# Altium PCB Heater PCB Column Coil.PcbDoc
Units mm, origin at the board's own origin, x right, y up, seen from the top; angles counter-clockwise.
Board outline 101.87 x 102 mm, 2 copper layers (Top Layer, Bottom Layer), stack 1.57 mm thick; 2 components, 1 nets, 2 pads, 0 vias.
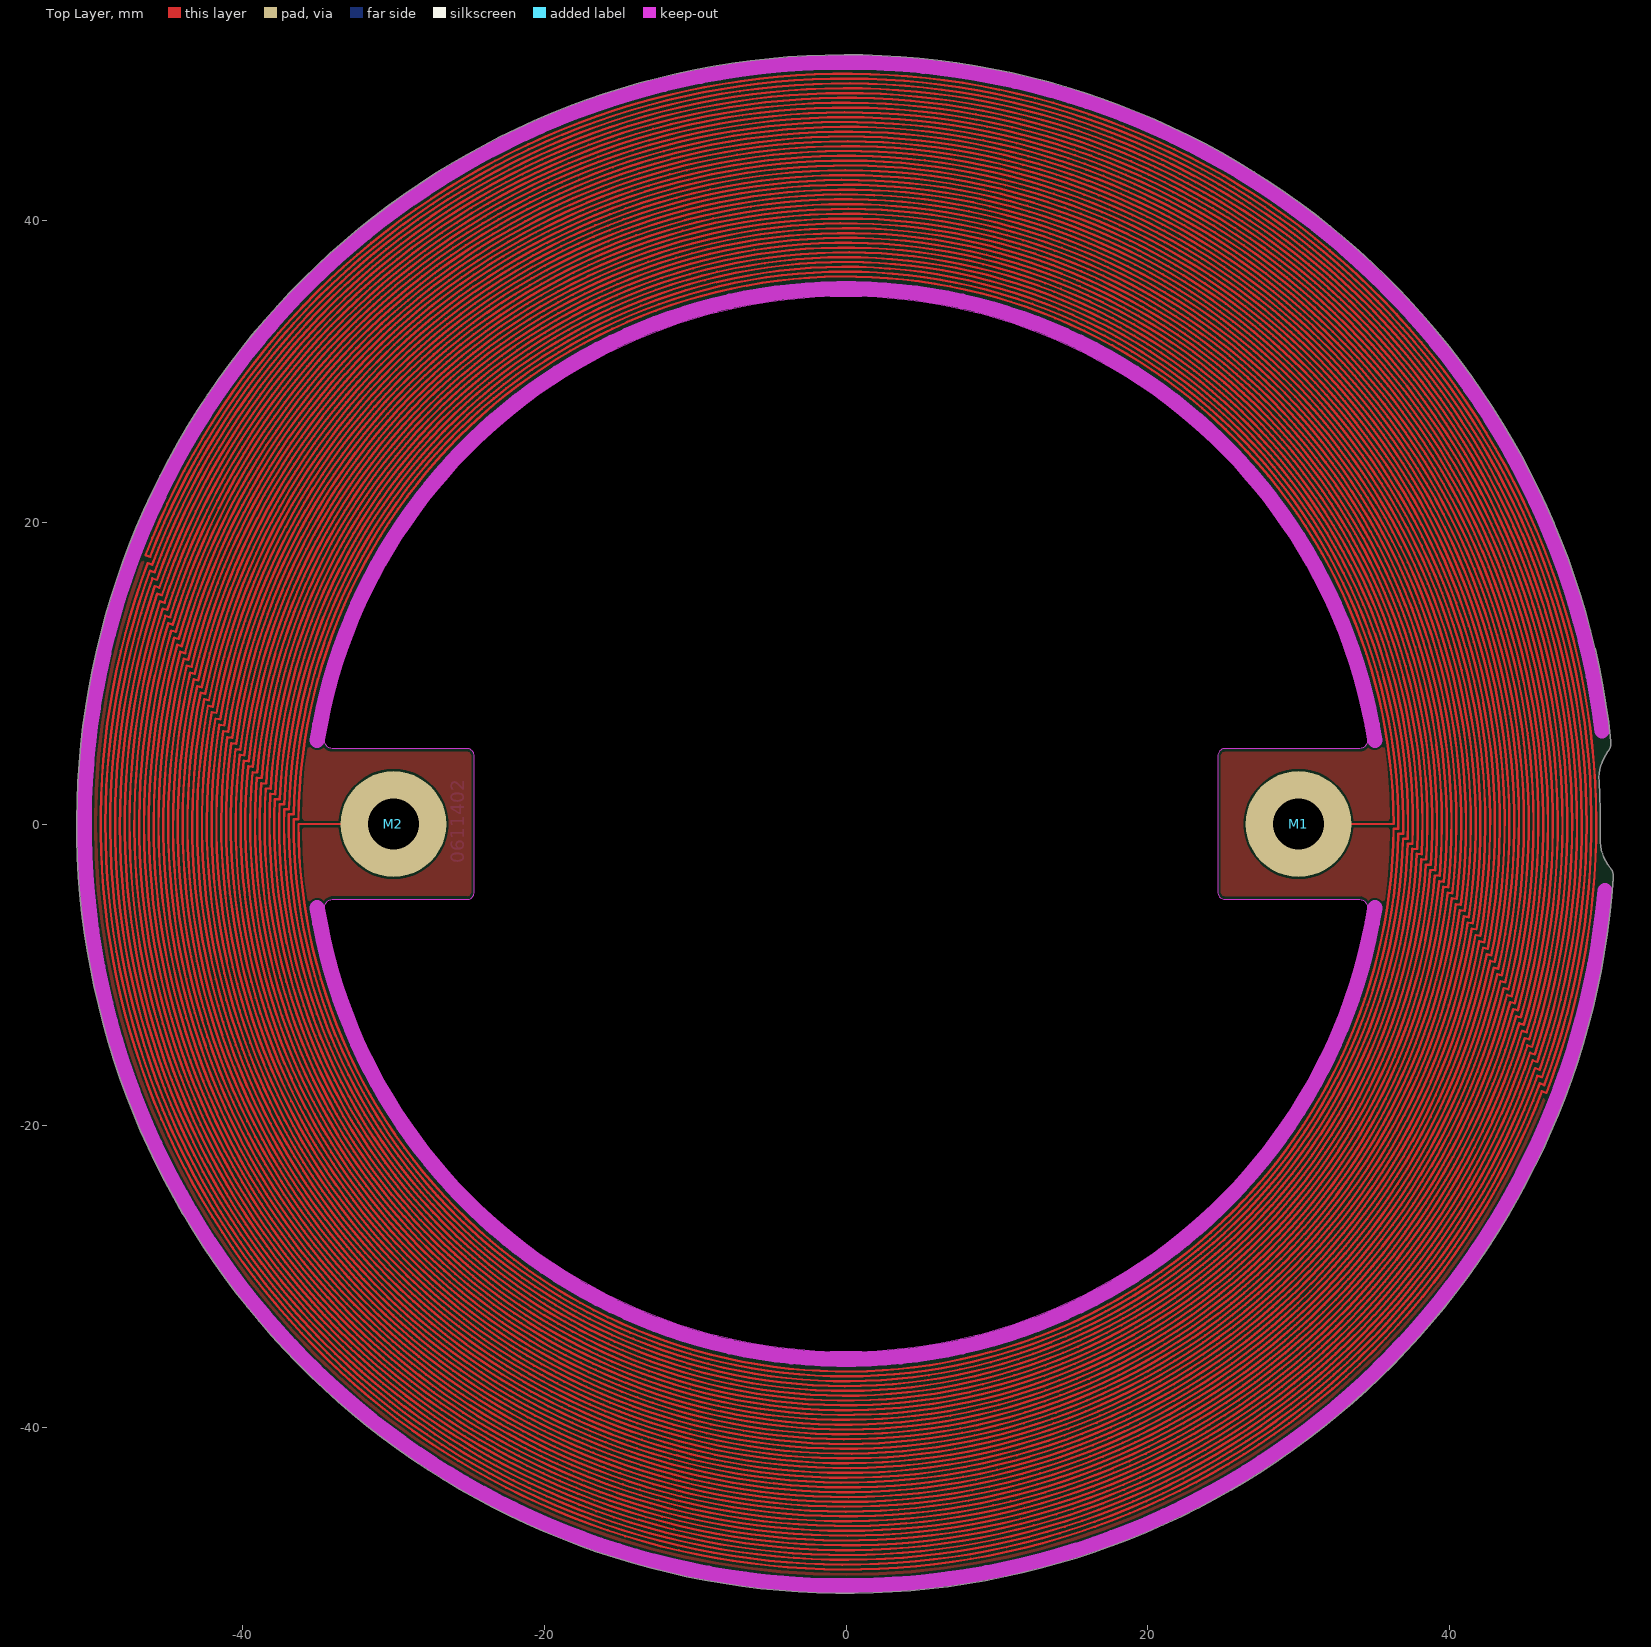
[diagram p0: Top Layer view]
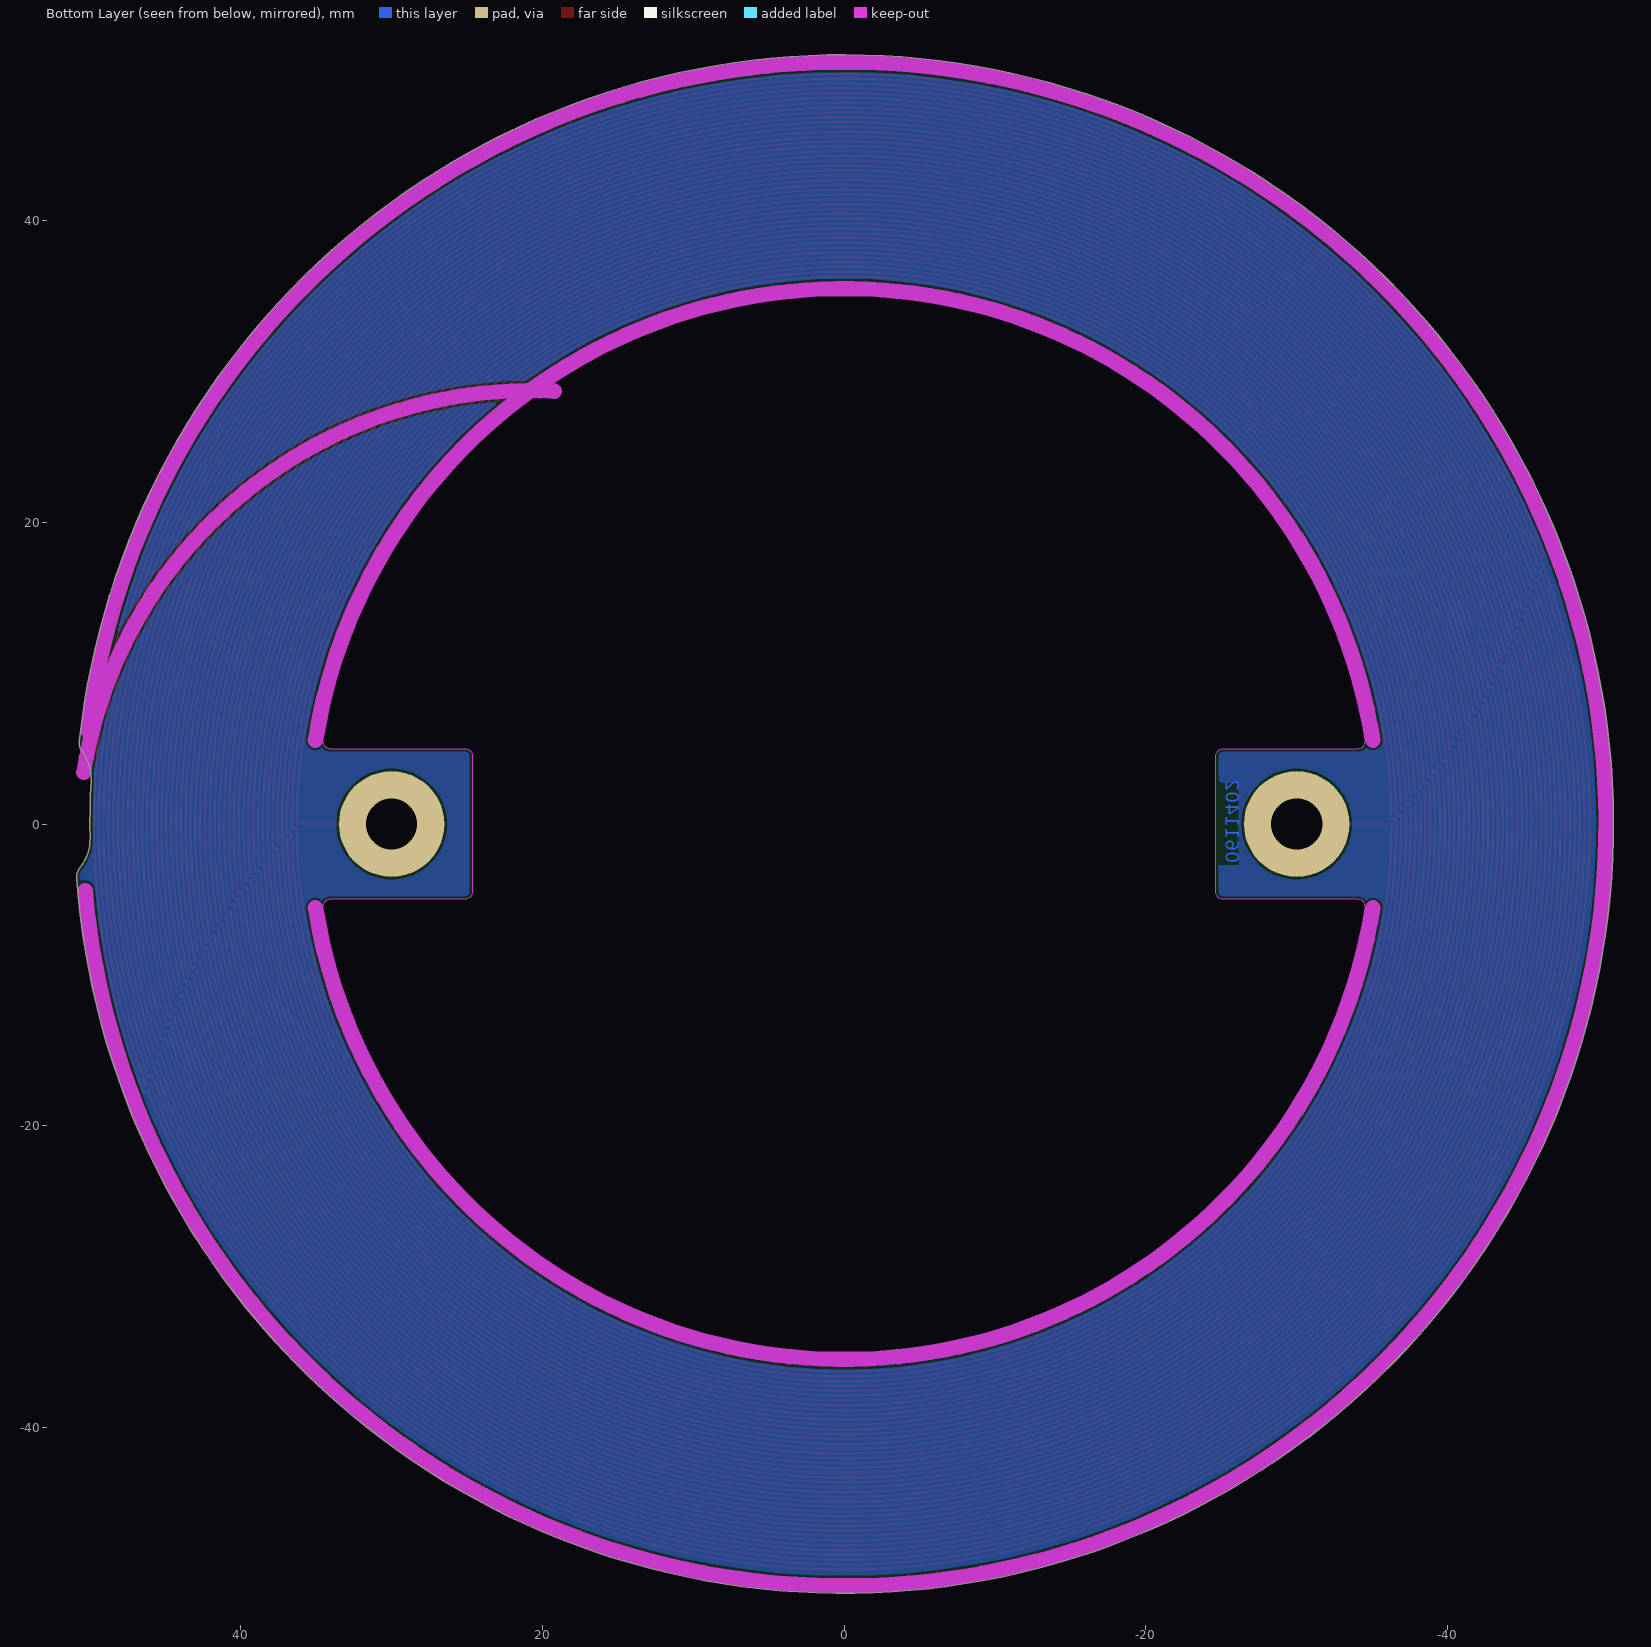
[diagram p1: Bottom Layer view, seen from below]

## Layer stack, top to bottom
Top Solder: solder mask 0.0102, Solder Resist, Dk 3.5
Top Layer: signal copper 0.0356
Dielectric 1: core 1.4986, Core-043, Dk 4.3
Bottom Layer: signal copper 0.0356
Bottom Solder: solder mask 0.0102, Solder Resist, Dk 3.5

## Board outline
50.874,-3.581 cw(c0,0) 50.703,5.499 cw(c49.709,5.391) 50.51,4.793 ccw(c52.915,3) 49.92,2.83 cw(c0.001,0) 49.991,-0.943 ccw(c52.991,-1) 50.655,-2.883 cw(c49.877,-3.511)
cut-out: -34.059,-5 -25.141,-5 ccw(c-25.141,-4.5) -24.641,-4.5 -24.641,4.5 ccw(c-25.141,4.5) -25.141,5 -34.059,5 cw(c-34.059,5.5) -34.552,5.58 cw(c0,0) 34.552,5.58 cw(c34.059,5.5) 34.059,5 25.141,5 ccw(c25.141,4.5) 24.641,4.5 24.641,-4.5 ccw(c25.141,-4.5) 25.141,-5 34.059,-5 cw(c34.059,-5.5) 34.552,-5.58 cw(c0,0) -34.552,-5.58 cw(c-34.059,-5.5)

## Design rules (kind name [scope] priority, off if disabled: settings)
BoardOutlineClearance [All] p1: gap=0.2 ignorepadtopadclearanceinfootprint=FALSE
Clearance [All] p1: gap=0.152 ignorepadtopadclearanceinfootprint=TRUE
ComponentClearance [All] p1: gap=0.127 collisioncheckmode=3 verticalgap=0.127 showdistances=TRUE
DiffPairsRouting [All] p1: maxlimit=0.254 minlimit=0.127 mostfreqgap=0.127 toplayer_minwidth=0.127 toplayer_maxwidth=25.4 toplayer_prefwidth=0.127 bottomlayer_minwidth=0.127 bottomlayer_maxwidth=25.4 bottomlayer_prefwidth=0.127 maxuncoupledlength=12.7
Height [All] p1: minheight=0 maxheight=1816.048 prefheight=12.7
HoleSize [All] p1: absolutevalues=TRUE maxlimit=6.3 minlimit=0.3 maxpercent=80.000 minpercent=20.000
HoleToHoleClearance [All] p1: gap=0.254 allowstackedmicrovias=FALSE
MinimumAnnularRing [All] p1: minimumring=0.152
MinimumSolderMaskSliver [All] p1: minsoldermaskwidth=0.152
PlaneClearance [All] p1: clearance=0.127
PlaneConnect PlaneConnectPowerPads [InPadClass('PowerPads')] p1: planeconnectstyle=Direct reliefexpansion=0.508 reliefentries=4 reliefconductorwidth=0.254 reliefairgap=0.254
PlaneConnect [All] p2: pad.planeconnectstyle=Relief pad.reliefexpansion=0.3 pad.reliefentries=4 pad.reliefconductorwidth=0.127 pad.reliefairgap=0.127 via.planeconnectstyle=Direct via.reliefexpansion=0.3 via.reliefentries=4 via.reliefconductorwidth=0.127 via.reliefairgap=0.127
PolygonConnect PolygonConnectPowerPads [All vs (InPadClass('PowerPads'))] p1: connectstyle=Direct reliefconductorwidth=0.254 reliefentries=4 polygonreliefangle="90 Angle" airgapwidth=0.254
PolygonConnect [All] p2: thpad.connectstyle=Relief thpad.reliefconductorwidth=0.127 thpad.reliefentries=4 thpad.polygonreliefangle="90 Angle" thpad.airgapwidth=0.127 smdpad.connectstyle=Relief smdpad.reliefconductorwidth=0.127 smdpad.reliefentries=4 smdpad.polygonreliefangle="90 Angle" smdpad.airgapwidth=0.127 via.connectstyle=Direct via.reliefconductorwidth=0.127 via.reliefentries=4 via.polygonreliefangle="90 Angle" via.airgapwidth=0.127
RoutingVias [All] p1: holewidth=0.3 width=0.6 viastyle="Through Hole" minholewidth=0.3 minwidth=0.6 maxholewidth=0.6 maxwidth=6.6
SilkToSilkClearance [All] p1: silktosilkclearance=0.127
SilkToSolderMaskClearance [IsPad] p1: minsilkscreentomaskgap=0.127 clearancetoexposedcopper=TRUE
SolderMaskExpansion [All] p1: expansion=0.051 istentingtop=FALSE
UnRoutedNet [All] p1: checkbadconnections=TRUE
Width Width_10mil [All] p1 off: maxlimit=25.4 minlimit=0.254 preferedwidth=0.254 minimp=50.000000 maximp=50.000000 favimp=50.000000
Width Width_6mil [All] p2: maxlimit=25.4 minlimit=0.152 preferedwidth=0.152 minimp=50.000000 maximp=50.000000 favimp=50.000000
Width Power_20mil [All] p3 off: maxlimit=25.4 minlimit=0.508 preferedwidth=0.508 minimp=50.000000 maximp=50.000000 favimp=50.000000
Width Power_12mil [All] p4 off: maxlimit=25.4 minlimit=0.305 preferedwidth=0.305 minimp=50.000000 maximp=50.000000 favimp=50.000000
Width Width_5mil [All] p5 off: maxlimit=25.4 minlimit=0.127 preferedwidth=0.127 minimp=50.000000 maximp=50.000000 favimp=50.000000
19 further rules are at their usual default settings.

## Components (designator, comment, footprint, x,y, rotation, side; value= is the part's Value field where it differs from the comment)
M1 "PTH" PTH-M3.4-D6.0#1 35.244,10.394 r0 top
M2 "PTH" PTH-M3.4-D6.0#2 -31.106,9.944 r0 top

## Footprints (in the part's own frame and the unit in brackets; to place one, negate y for a bottom-side part, rotate by r counter-clockwise, add the part's x,y. Pads: shape width x height; smd on the part's side, far side on the other; paste and mask are expansions set on the pad)
PTH-M3.4-D6.0#1 [mm] "Plated Through-Hole"
  round 7 / inner round 4.5 / far side round 7 hole 3.4: 1(-5.244,-10.394)
PTH-M3.4-D6.0#2 [mm] "Plated Through-Hole"
  round 7 / inner round 4.5 / far side round 7 hole 3.4: 1(1.106,-9.944)

## Part data
M1 M2: library part 45001811, "Plated Through-Hole, M3.4, Round Pad 6mm", Manufacturer=mechanical, Component Type="Mechanical, Board Item", id=45001811, Manufacturer P/N=mechanical, Preferred=0

## Nets (pads, with @x,y where several pads share a name; then routed paths per layer and width w, separated by ;. In a path a pad name is that pad's centre, name@x,y a point inside that pad or via, vN(x,y) a via of type N, cw(c..) or ccw(c..) an arc to the next point about the centre after c; other vN are vias at no path point)
Heater: M1.1 M2.1 | length 11474.8
  Top Layer w0.152: -36.3,0 M2.1 ; M1.1 36.3,0
  Top Layer w0.16: -36.3,0 ccw(c0,0) 36.299,-0.317 36.619,-0.32 ccw(c0,0) -36.614,0.639 -36.934,0.645 ccw(c0,0) 36.927,-0.967 37.247,-0.975 ccw(c0,0) -37.237,1.3 -37.557,1.312 ccw(c0,0) 37.544,-1.639 37.864,-1.653 ccw(c0,0) -37.848,1.984 -38.168,2 ccw(c0,0) 38.149,-2.333 38.468,-2.353 ccw(c0,0) -38.446,2.688 -38.765,2.711 ccw(c0,0) 38.74,-3.049 39.059,-3.074 ccw(c0,0) -39.031,3.415 -39.35,3.443 ccw(c0,0) 39.318,-3.786 39.637,-3.817 ccw(c0,0) -39.602,4.162 -39.92,4.196 ccw(c0,0) 39.882,-4.544 40.2,-4.58 ccw(c0,0) -40.158,4.931 -40.476,4.97 ccw(c0,0) 40.431,-5.323 40.748,-5.365 ccw(c0,0) -40.7,5.72 -41.017,5.765 ccw(c0,0) 40.965,-6.122 41.282,-6.17 ccw(c0,0) -41.226,6.53 -41.542,6.58 ccw(c0,0) 41.483,-6.942 41.799,-6.995 ccw(c0,0) -41.736,7.359 -42.051,7.415 ccw(c0,0) 41.985,-7.781 42.3,-7.84 ccw(c0,0) -42.23,8.209 -42.544,8.27 ccw(c0,0) 42.47,-8.641 42.783,-8.704 ccw(c0,0) -42.706,9.077 -43.019,9.144 ccw(c0,0) 42.937,-9.519 43.25,-9.588 ccw(c0,0) -43.165,9.965 -43.476,10.037 ccw(c0,0) 43.387,-10.416 43.698,-10.491 ccw(c0,0) -43.605,10.872 -43.916,10.949 ccw(c0,0) 43.818,-11.332 44.128,-11.412 ccw(c0,0) -44.027,11.797 -44.336,11.88 ccw(c0,0) 44.231,-12.266 44.539,-12.352 ccw(c0,0) -44.429,12.74 -44.737,12.828 ccw(c0,0) 44.623,-13.218 44.93,-13.309 ccw(c0,0) -44.812,13.701 -45.118,13.794 ccw(c0,0) 44.996,-14.187 45.302,-14.284 ccw(c0,0) -45.175,14.678 -45.48,14.777 ccw(c0,0) 45.349,-15.174 45.652,-15.275 ccw(c0,0) -45.517,15.673 -45.82,15.777 ccw(c0,0) 45.68,-16.176 45.982,-16.283 ccw(c0,0) -45.838,16.684 -46.139,16.793 ccw(c0,0) 45.991,-17.195 46.29,-17.307 ccw(c0,0) -46.138,17.711 -46.436,17.825 cw(c0,0) 46.436,-17.825 46.138,-17.711 cw(c0,0) -46.29,17.307 -45.991,17.195 cw(c0,0) 46.139,-16.793 45.838,-16.684 cw(c0,0) -45.982,16.283 -45.68,16.176 cw(c0,0) 45.82,-15.777 45.517,-15.673 cw(c0,0) -45.652,15.275 -45.349,15.174 cw(c0,0) 45.48,-14.777 45.175,-14.678 cw(c0,0) -45.302,14.284 -44.996,14.187 cw(c0,0) 45.118,-13.794 44.812,-13.701 cw(c0,0) -44.93,13.309 -44.623,13.218 cw(c0,0) 44.737,-12.828 44.429,-12.74 cw(c0,0) -44.539,12.352 -44.231,12.266 cw(c0,0) 44.336,-11.88 44.027,-11.797 cw(c0,0) -44.128,11.412 -43.818,11.332 cw(c0,0) 43.916,-10.949 43.605,-10.872 cw(c0,0) -43.698,10.491 -43.387,10.416 cw(c0,0) 43.476,-10.037 43.165,-9.965 cw(c0,0) -43.25,9.588 -42.937,9.519 cw(c0,0) 43.019,-9.144 42.706,-9.077 cw(c0,0) -42.783,8.704 -42.47,8.641 cw(c0,0) 42.544,-8.27 42.23,-8.209 cw(c0,0) -42.3,7.84 -41.985,7.781 cw(c0,0) 42.051,-7.415 41.736,-7.359 cw(c0,0) -41.799,6.995 -41.483,6.942 cw(c0,0) 41.542,-6.58 41.226,-6.53 cw(c0,0) -41.282,6.17 -40.965,6.122 cw(c0,0) 41.017,-5.765 40.7,-5.72 cw(c0,0) -40.748,5.365 -40.431,5.323 cw(c0,0) 40.476,-4.97 40.158,-4.931 cw(c0,0) -40.2,4.58 -39.882,4.544 cw(c0,0) 39.92,-4.196 39.602,-4.162 cw(c0,0) -39.637,3.817 -39.318,3.786 cw(c0,0) 39.35,-3.443 39.031,-3.415 cw(c0,0) -39.059,3.074 -38.74,3.049 cw(c0,0) 38.765,-2.711 38.446,-2.688 cw(c0,0) -38.468,2.353 -38.149,2.333 cw(c0,0) 38.168,-2 37.848,-1.984 cw(c0,0) -37.864,1.653 -37.544,1.639 cw(c0,0) 37.557,-1.312 37.237,-1.3 cw(c0,0) -37.247,0.975 -36.927,0.967 cw(c0,0) 36.934,-0.645 36.614,-0.639 cw(c0,0) -36.619,0.32 -36.299,0.317 cw(c0,0) 36.3,0

## Polygon pours and split planes (outlines as drawn)
no net on Outer outline (none): 50.874,-3.581 cw(c0,0) 50.703,5.499 cw(c49.709,5.391) 50.51,4.793 ccw(c52.915,3) 49.92,2.83 cw(c0.003,0) 49.991,-0.943 ccw(c52.991,-1) 50.655,-2.883 cw(c49.877,-3.511)
no net on Outer outline (none): 50.874,-3.581 cw(c0,0) 50.703,5.499 cw(c49.709,5.391) 50.51,4.793 ccw(c52.915,3) 49.92,2.83 cw(c0.003,0) 49.991,-0.943 ccw(c52.991,-1) 50.655,-2.883 cw(c49.877,-3.511)
no net on Bottom Layer "NONET_L02_P002" (solid, pour order 2): -51,-51 55.5,-51 55.8,-50.7 55.35,-50.25 55.35,52.35 -50.15,52.35 -51,53.2
no net on Top Layer "NONET_L01_P003" (solid, pour order 3): -51,54.3 -50.4,54.9 56.4,54.9 56.4,-41.3 46.7,-51 -51,-51 -51,53

## Keep-outs
Top Layer:
  lines w1: -35.063,-5.553 ccw(c0,0) 35.063,-5.553 ; -35.063,5.553 cw(c0,0) 35.063,5.553 ; 50.124,6.154 ccw(c0,0) 50.308,-4.401
Bottom Layer:
  lines w1: -35.063,-5.553 ccw(c0,0) 35.063,-5.553 ; -35.063,5.553 cw(c0,0) 35.063,5.553 ; 19.21,28.692 cw(c20.78,-1.267) 50.411,3.426 ; 50.124,6.154 ccw(c0,0) 50.308,-4.401

## Other copper
Bottom Layer:
  text "0611402" at -25.016,-2.587 h1.52 r90

## Silkscreen, mask and mechanical layers (free items; w line width, h text height)
Mechanical 1:
  lines w0.013: -34.552,-5.58 ccw(c0,0) 34.552,-5.58 ccw(c34.059,-5.5) 34.059,-5 25.141,-5 cw(c25.141,-4.5) 24.641,-4.5 24.641,4.5 cw(c25.141,4.5) 25.141,5 34.059,5 ccw(c34.059,5.5) 34.552,5.58 ccw(c0,0) -34.552,5.58 ccw(c-34.059,5.5) -34.059,5 -25.141,5 cw(c-25.141,4.5) -24.641,4.5 -24.641,-4.5 cw(c-25.141,-4.5) -25.141,-5 -34.059,-5 ccw(c-34.059,-5.5) -34.552,-5.58 ; 49.92,2.83 cw(c0,0) 49.991,-0.943 ccw(c52.991,-1) 50.655,-2.883 cw(c49.877,-3.511) 50.874,-3.581 cw(c0,0) 50.703,5.499 cw(c49.708,5.391) 50.51,4.793 ccw(c52.915,3) 49.92,2.83
Outer outline:
  the board outline again, w0.013
Inner outline:
  lines w0.013: 19.29,29.205 19.987,29.223 ; -34.552,-5.58 ccw(c0,0) 34.552,-5.58 ccw(c34.059,-5.5) 34.059,-5 25.141,-5 cw(c25.141,-4.5) 24.641,-4.5 24.641,4.5 cw(c25.141,4.5) 25.141,5 34.059,5 ccw(c34.059,5.5) 34.552,5.58 ccw(c0,0) -34.552,5.58 ccw(c-34.059,5.5) -34.059,5 -25.141,5 cw(c-25.141,4.5) -24.641,4.5 -24.641,-4.5 cw(c-25.141,-4.5) -25.141,-5 -34.059,-5 ccw(c-34.059,-5.5) -34.552,-5.58
0.4mm deep depth controlled slot:
  lines w0.013: -34.552,-5.58 cw(c-34.059,-5.5) -34.059,-5 ; -34.552,5.58 ccw(c-34.059,5.5) -34.059,5 ; 19.29,29.205 19.987,29.223 ; 34.059,-5 cw(c34.059,-5.5) 34.552,-5.58 ; 34.059,5 ccw(c34.059,5.5) 34.552,5.58 ; 49.65,4.795 49.942,3.404
  lines w1: 19.21,28.692 cw(c20.78,-1.267) 50.411,3.426